# EAGLE board motor (EAGLE 5.07)
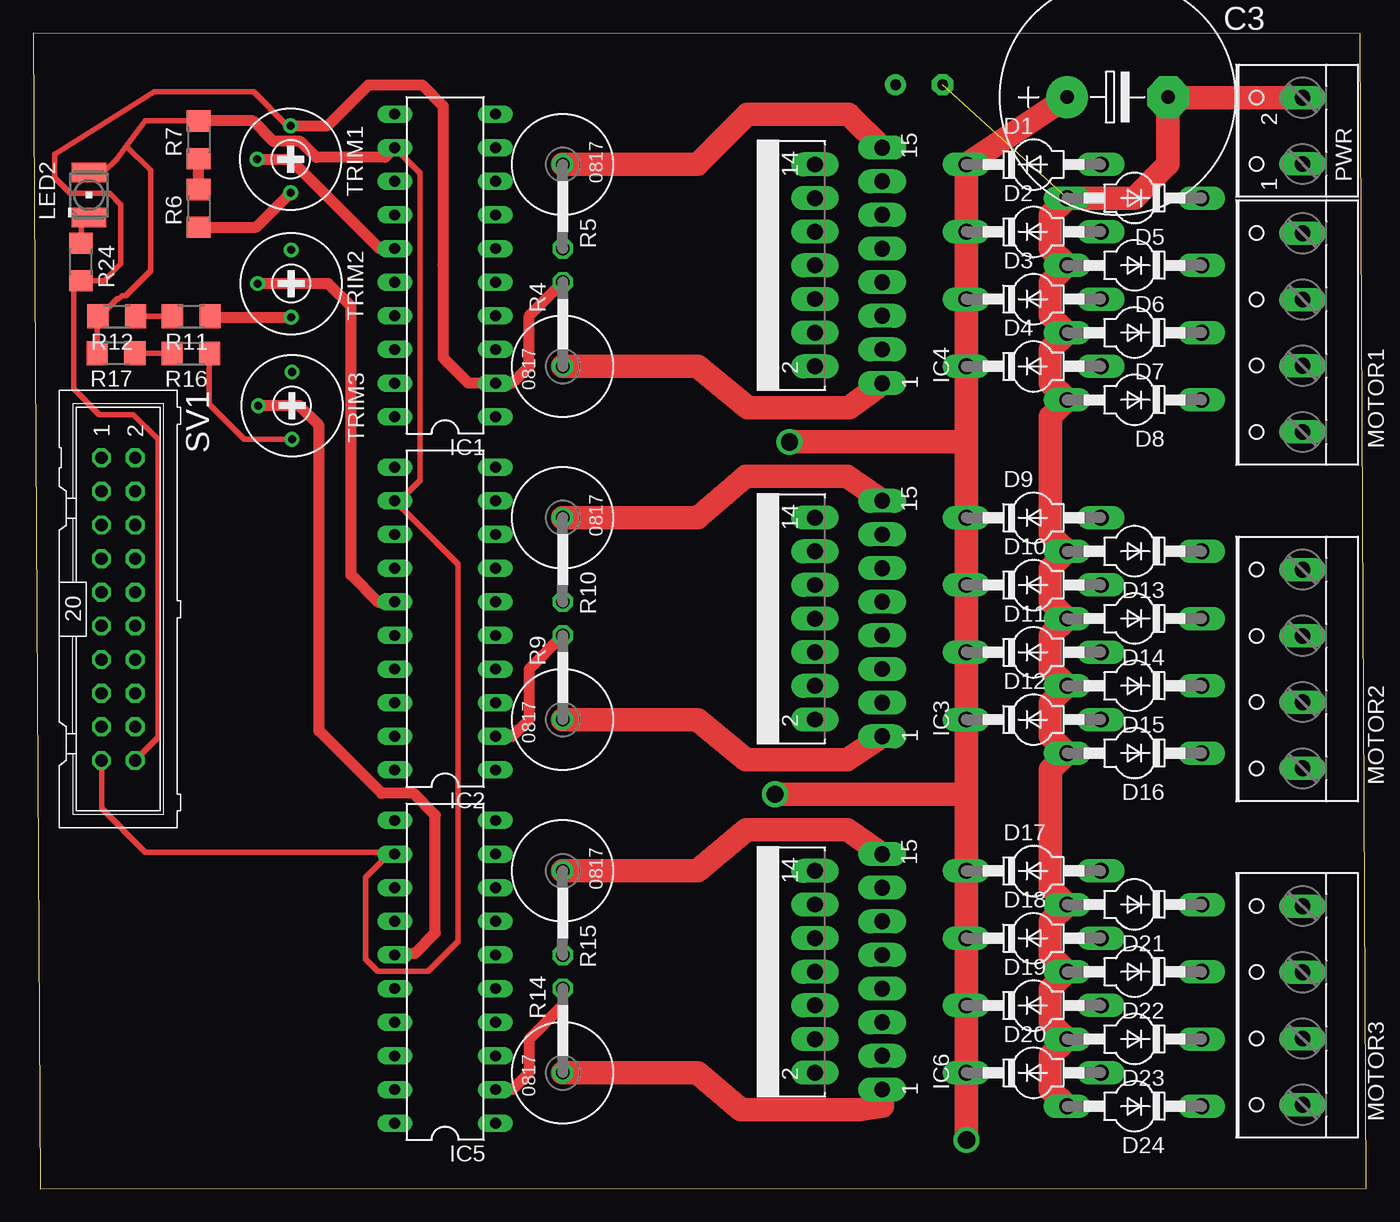
[diagram p0: board, top side]
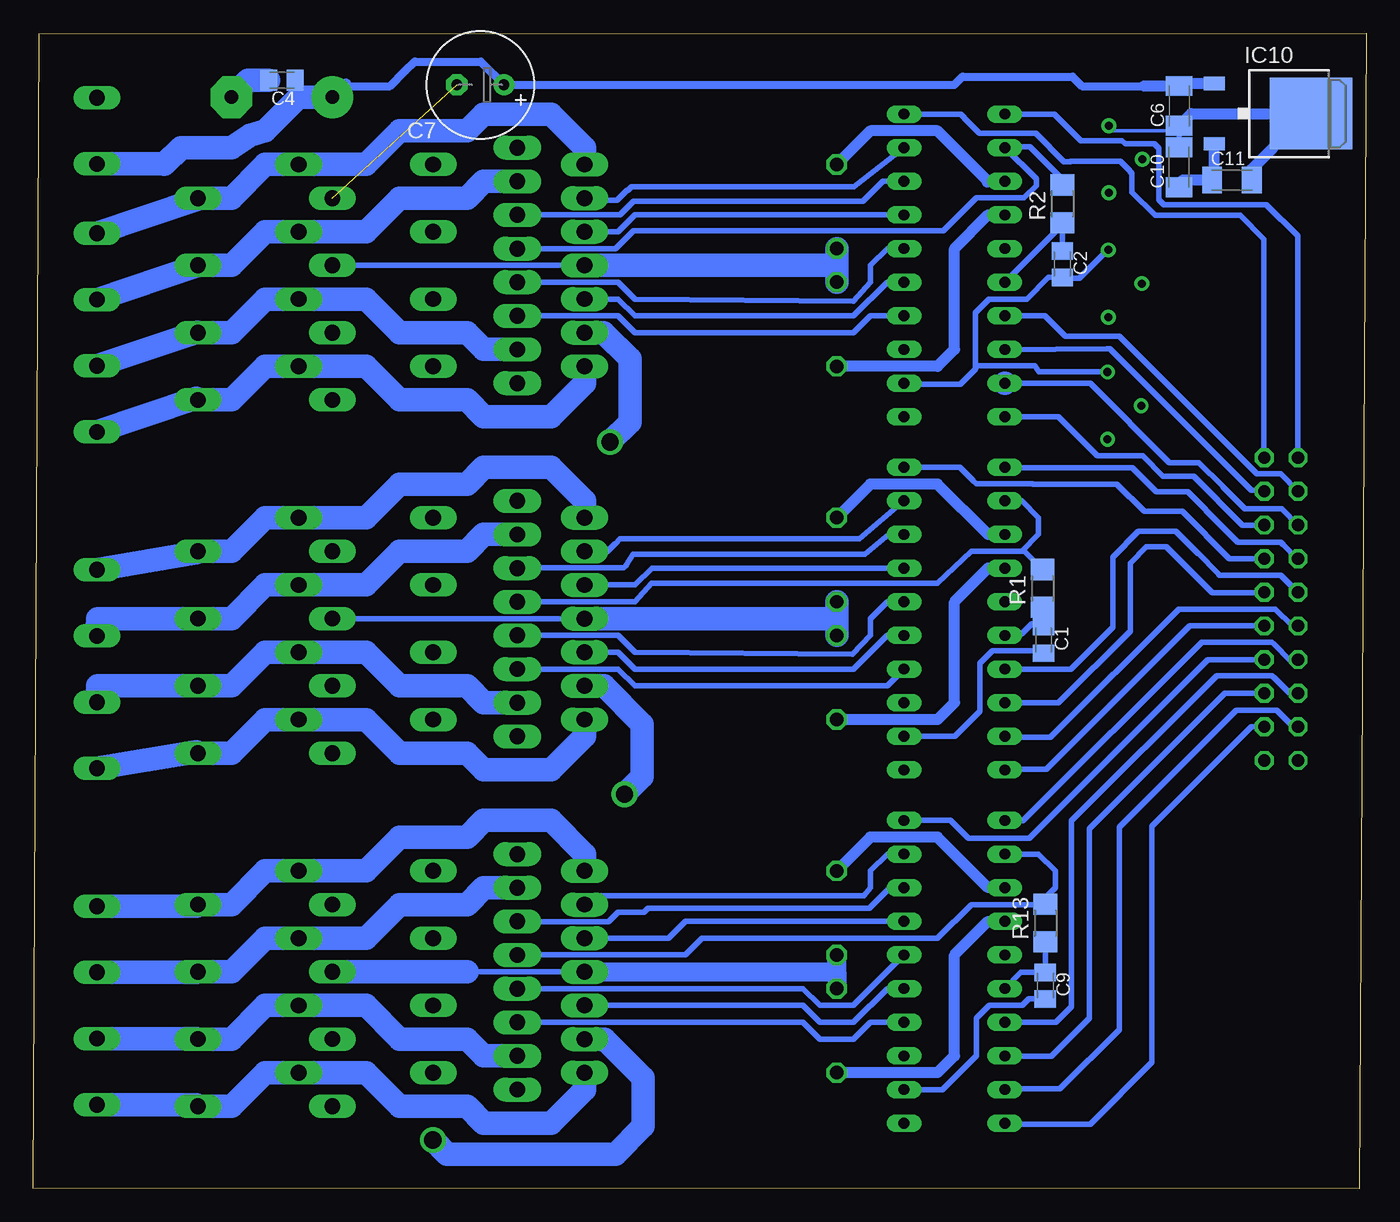
[diagram p1: board, bottom side, seen from below]

Size 100.71 x 87.25 mm. Coordinates in mm from the lower left corner, seen from the top.
Outline: 0.54,0 100.71,0.04 100.25,87.2 0,87.25 0.54,0
Copper layers (1*16): Top 0.035mm / dielectric 1.5mm / Bottom 0.035mm
Design rules "default": minimum track width 10mil, minimum drill 24mil, track to track 8mil, track to pad 8mil, pad to pad 8mil, via to via 8mil, smd to smd 8mil, copper to edge 40mil, drill to drill 8mil, minimum pad ring 10mil, minimum via ring 8mil, stop-mask expansion 4mil, vias tented up to drill 0mil, thermal gap 10mil

## Footprints (pad centres in the part's own frame; a part is rotated, then mirrored left to right if it is on the bottom)
C0805K = smd 1.3 x 1.6: 1 -1,0; 2 1,0
E7,5-18 = drill 1.016 pad 3.15 round: + -3.81,0 | drill 1.016 pad 3.15 octagon: - 3.81,0
C1206K = smd 1.5 x 2: 1 -1.5,0; 2 1.5,0
E3,5-8 = drill 0.813 pad 1.6 round: + -1.778,0 | drill 0.813 pad 1.6 octagon: - 1.778,0
SOD57-10 = drill 1.194 long: A 5.08,0; C -5.08,0
DIL20 = drill 0.813 long: 1 -11.43,-3.81; 2 -8.89,-3.81; 3 -6.35,-3.81; 4 -3.81,-3.81; 5 -1.27,-3.81; 6 1.27,-3.81; 7 3.81,-3.81; 8 6.35,-3.81; 9 8.89,-3.81; 10 11.43,-3.81; 11 11.43,3.81; 12 8.89,3.81; 13 6.35,3.81; 14 3.81,3.81; 15 1.27,3.81; 16 -1.27,3.81; 17 -3.81,3.81; 18 -6.35,3.81; 19 -8.89,3.81; 20 -11.43,3.81
MULTIWATT-15 = drill 1.2 long: 1 -8.89,-7.62; 2 -7.62,-2.54; 3 -6.35,-7.62; 4 -5.08,-2.54; 5 -3.81,-7.62; 6 -2.54,-2.54; 7 -1.27,-7.62; 8 0,-2.54; 9 1.27,-7.62; 10 2.54,-2.54; 11 3.81,-7.62; 12 5.08,-2.54; 13 6.35,-7.62; 14 7.62,-2.54; 15 8.89,-7.62
TO252 = smd 1 x 1.6: 1 -2.28,-4.8; 2 2.28,-4.8 | smd 5.4 x 6.2: 3 0,2.5
PLCC2 = smd 2.6 x 1.5: A 0,1.7; C 0,-1.7
W237-4 = drill 1.194 long: 1 -7.5,-1.27; 2 -2.5,-1.27; 3 2.5,-1.27; 4 7.5,-1.27
W237-102 = drill 1.194 long: 1 -2.5,-1.27; 2 2.5,-1.27
R1206 = smd 1.6 x 1.803: 1 -1.422,0; 2 1.422,0
P0817V = drill 1.016 octagon: 1 -5.08,0; 2 1.27,0
ML20 = drill 0.914 octagon: 1 -11.43,-1.27; 2 -11.43,1.27; 3 -8.89,-1.27; 4 -8.89,1.27; 5 -6.35,-1.27; 6 -6.35,1.27; 7 -3.81,-1.27; 8 -3.81,1.27; 9 -1.27,-1.27; 10 -1.27,1.27; 11 1.27,-1.27; 12 1.27,1.27; 13 3.81,-1.27; 14 3.81,1.27; 15 6.35,-1.27; 16 6.35,1.27; 17 8.89,-1.27; 18 8.89,1.27; 19 11.43,-1.27; 20 11.43,1.27
RTRIM3339P = drill 0.61 round: 1 -2.54,0; 2 0,-2.54; 3 2.54,0

## Placement (x,y rotation side)
C1  3,3n  [C0805K]  24.38,41.43 270 bottom
C2  3,3n  [C0805K]  22.96,69.8 270 bottom
C3  2,2m  [E7,5-18]  81.92,82.41 0 top
C4  100n  [C0805K]  81.92,83.68 180 bottom
C6  470u  [C1206K]  14.14,81.76 90 bottom
C7  100n  [E3,5-8]  66.93,83.34 180 bottom
C9  3,3n  [C0805K]  24.26,15.32 270 bottom
C10  10u  [C1206K]  14.16,77.12 90 bottom
C11  100n  [C1206K]  10.16,76.15 0 bottom
D1  BYV27  [SOD57-10]  75.57,77.33 0 top
D2  BYV27  [SOD57-10]  75.57,72.25 0 top
D3  BYV27  [SOD57-10]  75.57,67.17 0 top
D4  BYV27  [SOD57-10]  75.57,62.09 0 top
D5  BYV27  [SOD57-10]  83.19,74.79 180 top
D6  BYV27  [SOD57-10]  83.19,69.71 180 top
D7  BYV27  [SOD57-10]  83.19,64.63 180 top
D8  BYV27  [SOD57-10]  83.19,59.55 180 top
D9  BYV27  [SOD57-10]  75.57,50.66 0 top
D10  BYV27  [SOD57-10]  75.57,45.58 0 top
D11  BYV27  [SOD57-10]  75.57,40.5 0 top
D12  BYV27  [SOD57-10]  75.57,35.42 0 top
D13  BYV27  [SOD57-10]  83.19,48.12 180 top
D14  BYV27  [SOD57-10]  83.19,43.04 180 top
D15  BYV27  [SOD57-10]  83.19,37.96 180 top
D16  BYV27  [SOD57-10]  83.19,32.88 180 top
D17  BYV27  [SOD57-10]  75.57,23.99 0 top
D18  BYV27  [SOD57-10]  75.57,18.91 0 top
D19  BYV27  [SOD57-10]  75.57,13.83 0 top
D20  BYV27  [SOD57-10]  75.57,8.75 0 top
D21  BYV27  [SOD57-10]  83.19,21.45 180 top
D22  BYV27  [SOD57-10]  83.19,16.37 180 top
D23  BYV27  [SOD57-10]  83.19,11.29 180 top
D24  BYV27  [SOD57-10]  83.19,6.21 180 top
IC1  L297  [DIL20]  31.12,69.71 90 top
IC2  L297  [DIL20]  31.12,43.04 90 top
IC3  L298  [MULTIWATT-15]  56.52,43.04 90 top
IC4  L298  [MULTIWATT-15]  56.52,69.71 90 top
IC5  L297  [DIL20]  31.12,16.37 90 top
IC6  L298  [MULTIWATT-15]  56.52,16.37 90 top
IC10  7805DT  [TO252]  6.68,81.17 270 bottom
LED2  LG_T679-E1F1-1  [PLCC2]  4.22,75.03 0 top
MOTOR1  [W237-4]  94.62,64.63 90 top
MOTOR2  [W237-4]  94.62,39.23 90 top
MOTOR3  [W237-4]  94.62,13.83 90 top
PWR  [W237-102]  94.62,79.87 90 top
R1  22k  [R1206]  24.46,45.32 90 bottom
R2  22k  [R1206]  22.97,74.37 90 bottom
R4  0,5  [P0817V]  40.01,67.17 90 top
R5  0,5  [P0817V]  40.01,72.25 270 top
R6  5,6k  [R1206]  12.51,74.01 90 top
R7  560  [R1206]  12.52,79.19 90 top
R9  0,5  [P0817V]  40.01,40.5 90 top
R10  0,5  [P0817V]  40.01,45.58 270 top
R11  5,6k  [R1206]  11.95,65.86 180 top
R12  560  [R1206]  6.32,65.86 180 top
R13  22k  [R1206]  24.24,20.06 90 bottom
R14  0,5  [P0817V]  40.01,13.83 90 top
R15  0,5  [P0817V]  40.01,18.91 270 top
R16  5,6k  [R1206]  11.92,63.06 180 top
R17  560  [R1206]  6.27,63.08 180 top
R24  1k  [R1206]  3.62,69.97 270 top
SV1  [ML20]  6.44,43.76 270 top
TRIM1  10k  [RTRIM3339P]  19.46,77.73 270 top
TRIM2  10k  [RTRIM3339P]  19.49,68.34 270 top
TRIM3  10k  [RTRIM3339P]  19.56,59.12 270 top

## Library data of the parts
C1-C4 C6 C7 C9-C11 R1 R2 R4-R7 R9-R17 R24 TRIM1-TRIM3 = rcl
D1-D24 = diode
IC1-IC6 = st-microelectronics
IC10 = linear
LED2 = led; COLOR: green
MOTOR1-MOTOR3 PWR = con-wago-500
SV1 = con-ml

## Nets
+5V: IC1.12 IC2.12 IC3.9 IC4.9 IC5.12 IC6.9 LED2.A R1.2 R2.2 R7.2 R12.2 R13.2 R17.2 SV1.19
+24V: C3.+ C4.1 C6.2 C7.+ D1.C D2.C D3.C D4.C D9.C D10.C D11.C D12.C D17.C D18.C D19.C D20.C IC3.4 IC4.4 IC6.4 IC10.1 PWR.1
CLK1: IC1.18 SV1.4
CLK2: IC2.18 SV1.10
CLK3: IC5.18 SV1.16
CTL1: IC1.11 SV1.1
CTL2: IC2.11 SV1.7
CTL3: IC5.11 SV1.13
CW1: IC1.17 SV1.3
CW2: IC2.17 SV1.9
CW3: IC5.17 SV1.15
EN1: IC1.10 SV1.2
EN2: IC2.10 SV1.8
EN3: IC5.10 SV1.14
GND: C1.2 C2.2 C3.- C4.2 C6.1 C7.- C9.2 C10.2 C11.2 D5.A D6.A D7.A D8.A D13.A D14.A D15.A D16.A D21.A D22.A D23.A D24.A IC1.2 IC2.2 IC3.8 IC4.8 IC5.2 IC6.8 IC10.3 PWR.2 R4.2 R5.2 R9.2 R10.2 R14.2 R15.2 R24.2 SV1.20 TRIM1.1 TRIM2.1 TRIM3.1
HF1: IC1.19 SV1.5
HF2: IC2.19 SV1.11
HF3: IC5.19 SV1.17
N$1: IC1.9 IC4.12
N$2: IC1.7 IC4.10
N$3: IC1.6 IC4.7
N$4: IC1.4 IC4.5
N$6: C2.1 IC1.16 R2.1
N$7: IC1.5 IC4.6
N$8: IC1.8 IC4.11
N$9: IC2.9 IC3.12
N$10: IC2.7 IC3.10
N$11: IC2.6 IC3.7
N$12: IC1.14 IC4.1 R4.1
N$13: IC1.15 TRIM1.2
N$14: D4.A D8.C IC4.2 MOTOR1.1
N$15: D1.A D5.C IC4.14 MOTOR1.4
N$16: D2.A D6.C IC4.13 MOTOR1.3
N$17: D3.A D7.C IC4.3 MOTOR1.2
N$19: IC1.13 IC4.15 R5.1
N$20: IC2.4 IC3.5
N$21: C1.1 IC2.16 R1.1
N$22: IC2.5 IC3.6
N$23: R6.1 TRIM1.3
N$24: R6.2 R7.1
N$26: IC2.8 IC3.11
N$30: IC2.14 IC3.1 R9.1
N$31: D12.A D16.C IC3.2 MOTOR2.1
N$32: D9.A D13.C IC3.14 MOTOR2.4
N$33: D10.A D14.C IC3.13 MOTOR2.3
N$34: D11.A D15.C IC3.3 MOTOR2.2
N$35: IC2.13 IC3.15 R10.1
N$36: IC2.15 TRIM2.2
N$37: R11.1 TRIM2.3
N$38: R11.2 R12.1
N$39: IC5.9 IC6.12
N$40: IC5.7 IC6.10
N$41: IC5.6 IC6.7
N$42: IC5.4 IC6.5
N$43: C9.1 IC5.16 R13.1
N$44: IC5.5 IC6.6
N$45: IC5.8 IC6.11
N$46: IC5.14 IC6.1 R14.1
N$47: D20.A D24.C IC6.2 MOTOR3.1
N$48: D17.A D21.C IC6.14 MOTOR3.4
N$49: D18.A D22.C IC6.13 MOTOR3.3
N$50: D19.A D23.C IC6.3 MOTOR3.2
N$51: IC5.13 IC6.15 R15.1
N$52: IC5.15 TRIM3.2
N$53: R16.1 TRIM3.3
N$54: R16.2 R17.1
N$64: LED2.C R24.1
NET_5V: C10.1 C11.1 IC10.2
RS1: IC1.20 SV1.6
RS2: IC2.20 SV1.12
RS3: IC5.20 SV1.18

## Tracks (layer width: path | path; a pad name or v marks a point on that pad's centre or on a via)
+5V
  Top 0.406: 4.85,65.81 R12.2 5.03,65.86 | R7.2 8.46,80.62 7.04,78.71 | 6.3,77.73 6.27,77.68 | 7.04,78.71 6.3,77.73 | LED2.A 5.31,76.73 6.3,77.73 | 5.03,65.86 6.35,67.18 6.47,67.18 6.73,67.43 6.99,67.43 8.87,69.32 8.87,76.88 7.04,78.71 | R17.2 4.85,65.68 5.03,65.86 | SV1.19 5.17,28.72 8.47,25.41 27,25.41 | IC5.12 27.16,25.41 27,25.41 | 27,25.41 25.12,23.53 25.12,17.31 26.02,16.4 29.82,16.4 32.08,18.67 32.08,47.16 IC2.12 27.68,51.93 29.23,53.48 29.23,76.68 IC1.12
  Top 0.813: R7.2 16.61,80.62 18.14,79.08 20.18,79.08 21.39,77.88 26.58,77.88 IC1.12
  Bottom 0.406: IC6.9 51.44,17.64 50.17,18.91 32.39,18.91 29.85,21.45 24.77,21.45 24.43,21.79 | 24.43,21.79 23.5,22.72 23.5,23.99 24.77,25.26 IC5.12 | IC3.9 55.25,44.31 54,45.69 32.41,45.69 29.85,48.12 26.04,48.12 | 26.04,48.12 24.77,49.39 24.77,50.66 26.04,51.93 IC2.12 | 26.04,48.12 25.84,48.12 R1.2 | R13.2 24.24,21.6 24.43,21.79 | R2.2 22.97,76.23 25.42,78.69 27.23,78.69 IC1.12 24.95,76.24 24.95,75.73 25.87,74.81 29.47,74.81 31.94,72.33 55.37,72.33 56.72,70.98 IC4.9
+24V  (via drill 1.3 pad 1.78)
  Top 1.778: C3.+ D1.C D2.C D3.C D4.C 70.49,56.55 | 70.49,29.29 70.49,24.63 70.42,24.56 70.42,24.06 D17.C D18.C D19.C D20.C 70.51,8.73 v70.51,3.67 | 70.49,29.29 D12.C D11.C D10.C D9.C 70.49,56.55 | v57.14,56.38 70.32,56.38 70.49,56.55 | v56.03,29.79 69.98,29.79 70.49,29.29
  Bottom 0.61: 77.27,83.25 73.75,83.25 72.6,84.39 | 72.6,84.39 | 72.6,84.39 71.89,85.11 66.91,85.11 C7.+ 31.13,83.34 30.51,83.96 22.2,83.96 21.47,83.24 15.15,83.24 15.14,83.26
  Bottom 0.813: C4.1 80.92,82.68 80.65,82.41 | IC10.1 13.95,83.45 C6.2 15.14,83.26 16.81,83.26 | C3.+ 77.27,83.25 77.1,83.42
  Bottom 1.778: PWR.1 90.85,77.37 90.81,77.33 89.54,78.6 85.73,78.6 84.31,79.55 83.19,79.87 80.65,82.41 C3.+ | IC4.4 57.62,64.63 55.63,62.65 55.63,57.88 v57.14,56.38 | IC3.4 57.6,37.96 54.72,35.08 54.72,31.1 v56.03,29.79 | IC6.4 57.53,11.29 54.63,8.39 54.63,4.71 56.73,2.61 69.45,2.61 v70.51,3.67
CLK1
  Bottom 0.406: IC1.18 27.3,63.35 19.6,63.42 19.39,63.42 8.7,52.73 7.78,52.73 SV1.4
CLK2
  Bottom 0.406: IC2.18 23.25,36.69 17.85,42.1 17.85,47.24 16.61,48.47 15.11,48.47 11.63,45 7.74,45 SV1.10
CLK3
  Bottom 0.406: SV1.16 10.69,37.41 20.91,27.19 20.91,12.88 23.78,10.01 27.29,10.01 IC5.18
CTL1
  Bottom 0.406: IC1.11 23.57,81.14 21.56,79.13 18.47,79.13 18.23,78.89 16.01,78.89 15.68,78.55 15.68,74.67 15.32,74.31 7.55,74.31 5.19,71.95 5.19,55.22 SV1.1
CTL2
  Bottom 0.406: 23.76,54.44 22.66,54.44 | 23.76,54.44 27.28,54.44 IC2.11 | SV1.7 5.24,47.57 6.29,48.62 | 6.29,48.62 | 6.29,48.62 6.48,48.81 9.71,48.81 12.13,51.23 12.13,51.25 13.48,52.6 15.86,52.6 17.68,54.43 23.74,54.43 23.76,54.44
CTL3
  Bottom 0.406: SV1.13 5.82,39.95 6.96,41.1 | 6.96,41.1 | 6.96,41.1 7.14,41.27 12.44,41.27 25.94,27.77 27.28,27.77 IC5.11
CW1
  Bottom 0.406: IC1.17 24.28,65.9 22.73,64.35 18.67,64.35 8.28,53.96 6.48,53.96 SV1.3
CW2
  Bottom 0.406: IC2.17 22.32,39.23 19.16,42.39 19.16,47.68 17.21,49.63 14.39,49.63 12.68,47.92 11.26,46.5 11.26,46.49 11.09,46.33 6.46,46.33 SV1.9
CW3
  Bottom 0.406: SV1.15 5.8,37.41 7.01,38.61 7.03,38.61 7.16,38.75 11.31,38.75 22.28,27.78 22.28,13.73 23.45,12.56 IC5.17
EN1
  Bottom 0.406: IC1.10 34.9,81.12 30.64,81.12 30.37,80.84 30.37,80.82 29.22,79.68 24.97,79.68 22.84,77.55 22.38,77.55 22.36,77.57 18.58,77.57 17.87,76.86 17.87,76.84 17.71,76.68 17.71,75.24 15.96,73.48 9.54,73.48 7.75,71.7 7.75,55.24 SV1.2
EN2
  Bottom 0.406: IC2.10 34.92,54.49 30.7,54.49 29.71,53.5 29.71,53.46 29.47,53.22 25.24,53.22 25.21,53.19 18.85,53.19 16.79,51.14 13.92,51.14 10.35,47.57 SV1.8
EN3
  Bottom 0.406: SV1.14 11.99,39.95 25.46,26.48 30.08,26.48 31.41,27.8 IC5.10
GND  (1 unrouted)
  Top 0.406: TRIM1.1 19.2,80.27 16.65,82.82 9.15,82.82 1.63,78.09 1.63,76.33 2.81,75.15 5.77,75.15 6.63,74.29 6.63,69.83 5.36,68.55 R24.2 3.05,67.98 3.05,60.41 5.01,58.45 7.56,58.45 9.44,56.57 9.44,34.08 SV1.20 | 30.98,69.97 30.76,69.74 | TRIM2.1 19.5,70.87
  Top 0.813: IC5.2 36.2,7.48 37.47,8.75 37.47,11.29 40.01,13.83 R14.2 | IC2.2 36.2,34.15 37.47,35.42 37.47,39.23 R9.2 | R4.2 37.47,65.9 37.47,62.09 36.2,60.82 IC1.2 34.91,60.84 32.88,60.84 30.98,62.74 30.98,69.97 30.98,81.74 29.37,83.35 25.33,83.35 22.25,80.27 TRIM1.1
  Top 1.778: D24.A 76.84,7.48 76.84,10.02 D23.A 76.84,12.56 76.84,15.1 D22.A 76.84,17.64 76.84,20.18 D21.A 76.84,22.72 76.84,31.61 D16.A 76.84,34.15 76.84,36.69 D15.A 76.84,39.23 76.84,41.77 D14.A 76.84,44.31 76.84,46.85 D13.A 76.84,49.39 76.84,58.28 D8.A 76.84,60.82 76.84,63.36 D7.A 76.84,65.9 76.84,68.44 D6.A 76.84,70.98 76.84,73.52 D5.A 83.19,74.79 85.73,77.33 C3.- 85.77,82.37 PWR.2
  Bottom 0.254: C6.1 14.61,79.87 19.69,79.87 TRIM1.1
  Bottom 0.406: 67.95,16.37 IC6.8 | IC4.8 D6.A | D14.A IC3.8 | TRIM2.1 19.55,70.88 21.7,68.73 22.89,68.73 C2.2 24.01,68.8 25.66,67.15 28.51,67.15 29.53,66.13 29.53,61.87 | C1.2 24.44,40.62 28.25,40.62 29.21,39.66 29.21,36.05 31.1,34.15 IC2.2 | C10.2 14.12,80.23 C6.1 | TRIM3.1 24.75,61.66 25.05,62.14 29.43,62.14 29.53,61.87 | IC1.2 34.85,60.74 30.66,60.74 29.53,61.87 | C9.2 25.51,14.33 25.99,13.85 28.49,13.85 29.47,12.87 29.47,10.04 32.04,7.47 34.91,7.47 IC5.2
  Bottom 0.813: C6.1 13.23,81.17 IC10.3 4.72,80.63 4.85,80.63 5.27,80.21 5.43,80.21 8.66,76.98 C11.2
  Bottom 1.422: IC6.8 40.01,16.37 | 40.01,16.37 R15.2 | 40.01,16.37 R14.2
  Bottom 1.778: D22.A 67.95,16.37 | IC3.8 40.01,43.04 | 40.01,43.04 R9.2 | 40.01,43.04 R10.2 | IC4.8 40.01,69.71 R5.2 R4.2 | C4.2 84.46,83.68 C3.-
HF1
  Bottom 0.406: IC1.19 20.86,60.82 14.87,54.83 12.65,54.83 10.86,53.03 10.86,53.01 9.18,51.32 6.38,51.32 SV1.5
  Bottom 1.778: IC1.19
HF2
  Bottom 0.406: IC2.19 27.22,34.07 23.86,34.07 14.16,43.76 6.88,43.76 5.61,42.49 SV1.11
HF3
  Bottom 0.406: SV1.17 5.52,34.87 6.77,36.11 9.84,36.11 18.68,27.28 18.68,12.01 23.14,7.55 27.24,7.55 IC5.19
N$1
  Bottom 0.406: IC1.9 38.7,75.64 55.52,75.64 55.77,75.38 55.84,75.38 56.61,74.62 58.88,74.62 IC4.12
N$2
  Bottom 0.406: IC4.10 56.52,72.25 55.25,73.52 IC1.7
N$3
  Bottom 0.406: IC4.7 56.52,68.44 55.25,67.17 38.76,67.01 37.47,68.44 37.47,69.71 36.2,70.98 IC1.6
N$4
  Bottom 0.406: IC4.5 56.52,65.9 55.25,64.63 38.74,64.63 37.47,65.9 IC1.4
N$6
  Bottom 0.406: C2.1 R2.1 22.97,72.79 IC1.16
N$7
  Bottom 0.406: IC4.6 56.52,67.17 55.25,65.9 38.74,65.9 36.2,68.44 IC1.5
N$8
  Bottom 0.406: IC4.11 56.36,73.52 55.35,74.54 38.04,74.54 37.62,74.96 | 37.62,74.96 | 37.62,74.96 36.51,76.07 IC1.8
N$9
  Bottom 0.406: IC2.9 38.28,49.06 56.36,49.06 56.74,48.69 56.77,48.69 57.36,48.1 59.03,48.1 IC3.12
N$10
  Bottom 0.406: IC3.10 55.25,45.58 53.98,46.85 IC2.7
N$11
  Bottom 0.406: IC3.7 56.52,41.77 55.25,40.5 38.81,40.34 37.47,41.77 37.47,43.04 36.2,44.31 IC2.6
N$12
  Top 1.778: IC4.1 61.63,58.98 54.01,58.98 50.17,62.09 R4.1
  Bottom 0.813: R4.1 32.39,62.09 31.12,63.36 31.12,70.98 28.58,73.52 IC1.14
N$13
  Top 0.813: TRIM1.2 19.42,77.73 26.17,70.98 IC1.15
N$14
  Bottom 1.778: MOTOR1.1 88.39,59.67 D8.C 85.73,59.55 83.19,62.09 D4.A 75.57,62.09 73.03,59.55 67.95,59.55 66.68,58.28 61.6,58.28 59.06,60.82 IC4.2
N$15
  Bottom 1.778: MOTOR1.4 88.39,74.67 D5.C 85.73,74.79 83.19,77.33 D1.A 75.57,77.33 73.03,79.87 67.95,79.87 66.68,81.14 61.6,81.14 59.06,78.6 IC4.14
N$16
  Bottom 1.778: MOTOR1.3 88.31,69.67 D6.C 85.73,69.71 83.19,72.25 D2.A 75.57,72.25 73.03,74.79 67.95,74.79 66.68,76.06 IC4.13
N$17
  Bottom 1.778: MOTOR1.2 88.31,64.67 D7.C 85.73,64.63 83.19,67.17 D3.A 75.57,67.17 73.03,64.63 67.95,64.63 66.68,63.36 IC4.3
N$19
  Top 1.778: IC4.15 61.6,81.14 53.98,81.14 50.17,77.33 R5.1
  Bottom 0.813: R5.1 37.47,79.87 32.39,79.87 28.58,76.06 28.62,76.03 28.65,76.03 28.61,76.06 IC1.13
N$20
  Bottom 0.406: IC3.5 56.52,39.23 55.25,37.96 36.2,37.96 IC2.4
N$21
  Bottom 0.406: R1.1 24.46,42.68 C1.1 25.26,42.64 26.02,41.88 27.2,41.88 IC2.16
N$22
  Bottom 0.406: IC3.6 56.52,40.5 55.25,39.23 38.74,39.23 36.2,41.77 IC2.5
N$23
  Top 0.813: R6.1 16.86,72.59 TRIM1.3
N$24
  Top 0.813: R7.1 12.52,75.44 R6.2
N$26
  Bottom 0.406: IC2.8 36.08,49.39 37.88,47.92 55.4,47.92 55.92,47.08 55.92,47.05 56.11,46.86 64.13,46.86 IC3.11
N$30
  Top 1.778: IC3.1 61.48,32.37 53.86,32.37 50.17,35.42 R9.1
  Bottom 0.813: R9.1 32.39,35.42 31.12,36.69 31.12,44.31 28.58,46.85 IC2.14
N$31
  Bottom 1.778: MOTOR2.1 88.39,33 D16.C 85.73,32.88 83.19,35.42 D12.A 75.57,35.42 73.03,32.88 67.95,32.88 66.68,31.61 61.6,31.61 59.06,34.15 IC3.2
N$32
  Bottom 1.778: MOTOR2.4 88.39,48 D13.C 85.73,48.12 83.19,50.66 D9.A 75.57,50.66 73.03,53.2 67.95,53.2 66.68,54.47 61.6,54.47 59.06,51.93 IC3.14
N$33
  Bottom 1.778: MOTOR2.3 95.85,43.04 D14.C 85.73,43.04 83.19,45.58 D10.A 75.57,45.58 73.03,48.12 67.95,48.12 66.68,49.39 IC3.13
N$34
  Bottom 1.778: MOTOR2.2 95.85,37.96 D15.C 85.73,37.96 83.19,40.5 D11.A 75.57,40.5 73.03,37.96 67.95,37.96 66.68,36.69 IC3.3
N$35
  Top 1.778: IC3.15 61.47,53.78 53.85,53.78 50.17,50.66 R10.1
  Bottom 0.813: R10.1 37.47,53.2 32.39,53.2 28.58,49.39 IC2.13
N$36
  Top 0.813: TRIM2.2 22.29,68.34 24.01,66.63 24.01,46.34 26.11,44.24 27.24,44.24 IC2.15
N$37
  Top 0.813: TRIM2.3 13.43,65.8 R11.1
N$38
  Top 0.406: R11.2 R12.1
N$39
  Bottom 0.406: IC5.9 36.2,25.26 37.47,23.99 37.47,22.72 37.94,22.12 55.58,22.12 55.59,22.12 58.4,22.12 IC6.12
N$40
  Bottom 0.406: IC6.10 52.71,18.91 51.44,20.18 IC5.7
N$41
  Bottom 0.406: IC6.7 42.55,15.1 41.28,13.83 38.74,13.83 IC5.6
N$42
  Bottom 0.406: IC6.5 42.55,12.56 41.28,11.29 38.74,11.29 37.47,12.56 IC5.4
N$43
  Bottom 0.406: R13.1 24.24,16.35 C9.1 26.09,16.33 IC5.16
N$44
  Bottom 0.406: IC6.6 42.55,13.83 41.28,12.56 38.74,12.56 36.2,15.1 IC5.5
N$45
  Bottom 0.406: IC5.8 35.97,22.72 37.54,21.16 54.28,21.16 54.57,20.87 56.55,20.87 57.25,20.17 64.12,20.17 IC6.11
N$46
  Top 1.778: IC6.1 64.14,6.21 62.38,5.97 53.48,5.97 50.17,8.75 R14.1
  Bottom 0.813: R14.1 32.39,8.75 31.12,10.02 31.12,17.64 28.58,20.18 IC5.14
N$47
  Bottom 1.778: MOTOR3.1 88.39,6.33 D24.C 85.73,6.21 83.19,8.75 D20.A 75.57,8.75 73.03,6.21 67.95,6.21 66.68,4.94 61.6,4.94 59.06,7.48 IC6.2
N$48
  Bottom 1.778: MOTOR3.4 88.39,21.33 D21.C 85.73,21.45 83.19,23.99 D17.A 75.57,23.99 73.03,26.53 67.95,26.53 66.68,27.8 61.6,27.8 59.06,25.26 IC6.14
N$49
  Bottom 1.778: MOTOR3.3 88.31,16.33 D22.C 85.73,16.37 83.19,18.91 D18.A 75.57,18.91 73.03,21.45 67.95,21.45 66.68,22.72 IC6.13
N$50
  Bottom 1.778: MOTOR3.2 88.31,11.33 D23.C 85.73,11.29 83.19,13.83 D19.A 75.57,13.83 73.03,11.29 67.95,11.29 66.68,10.02 IC6.3
N$51
  Top 1.778: IC6.15 61.52,27.08 53.9,27.08 50.17,23.99 R15.1
  Bottom 0.813: R15.1 37.47,26.53 32.39,26.53 28.58,22.72 IC5.13
N$52
  Top 0.813: TRIM3.2 20.11,59.12 21.59,57.64 21.59,34.56 26.32,29.84 28.75,29.84 30.38,28.21 30.38,19.3 28.84,17.76 27.43,17.76 IC5.15
N$53
  Top 0.406: TRIM3.3 15.94,56.58 13.31,59.21 13.31,63.03 R16.1
N$54
  Top 0.406: R16.2 7.71,63.06 R17.1
N$64
  Top 0.406: R24.1 3.62,72.73 LED2.C
NET_5V
  Bottom 0.813: IC10.2 11.48,76.33 C11.1 13.87,76.15 C10.1
RS1
  Bottom 0.406: IC1.20 23.28,58.28 20.32,55.32 16.89,55.32 15.37,53.8 13.05,53.8 9.36,50.11 SV1.6
RS2
  Bottom 0.406: IC2.20 27.27,31.65 24.17,31.65 13.33,42.49 SV1.12
RS3
  Bottom 0.406: SV1.18 8.71,34.87 16.21,27.37 16.21,9.53 20.86,4.88 27.24,4.88 IC5.20